# Altium PCB SW 12.PcbDoc
Units mil, origin at the board's own origin, x right, y up, seen from the top; angles counter-clockwise.
Board outline 1623 x 1170 mil, 2 copper layers (Top Layer, Bottom Layer); 16 components, 9 nets, 43 pads, 14 vias.
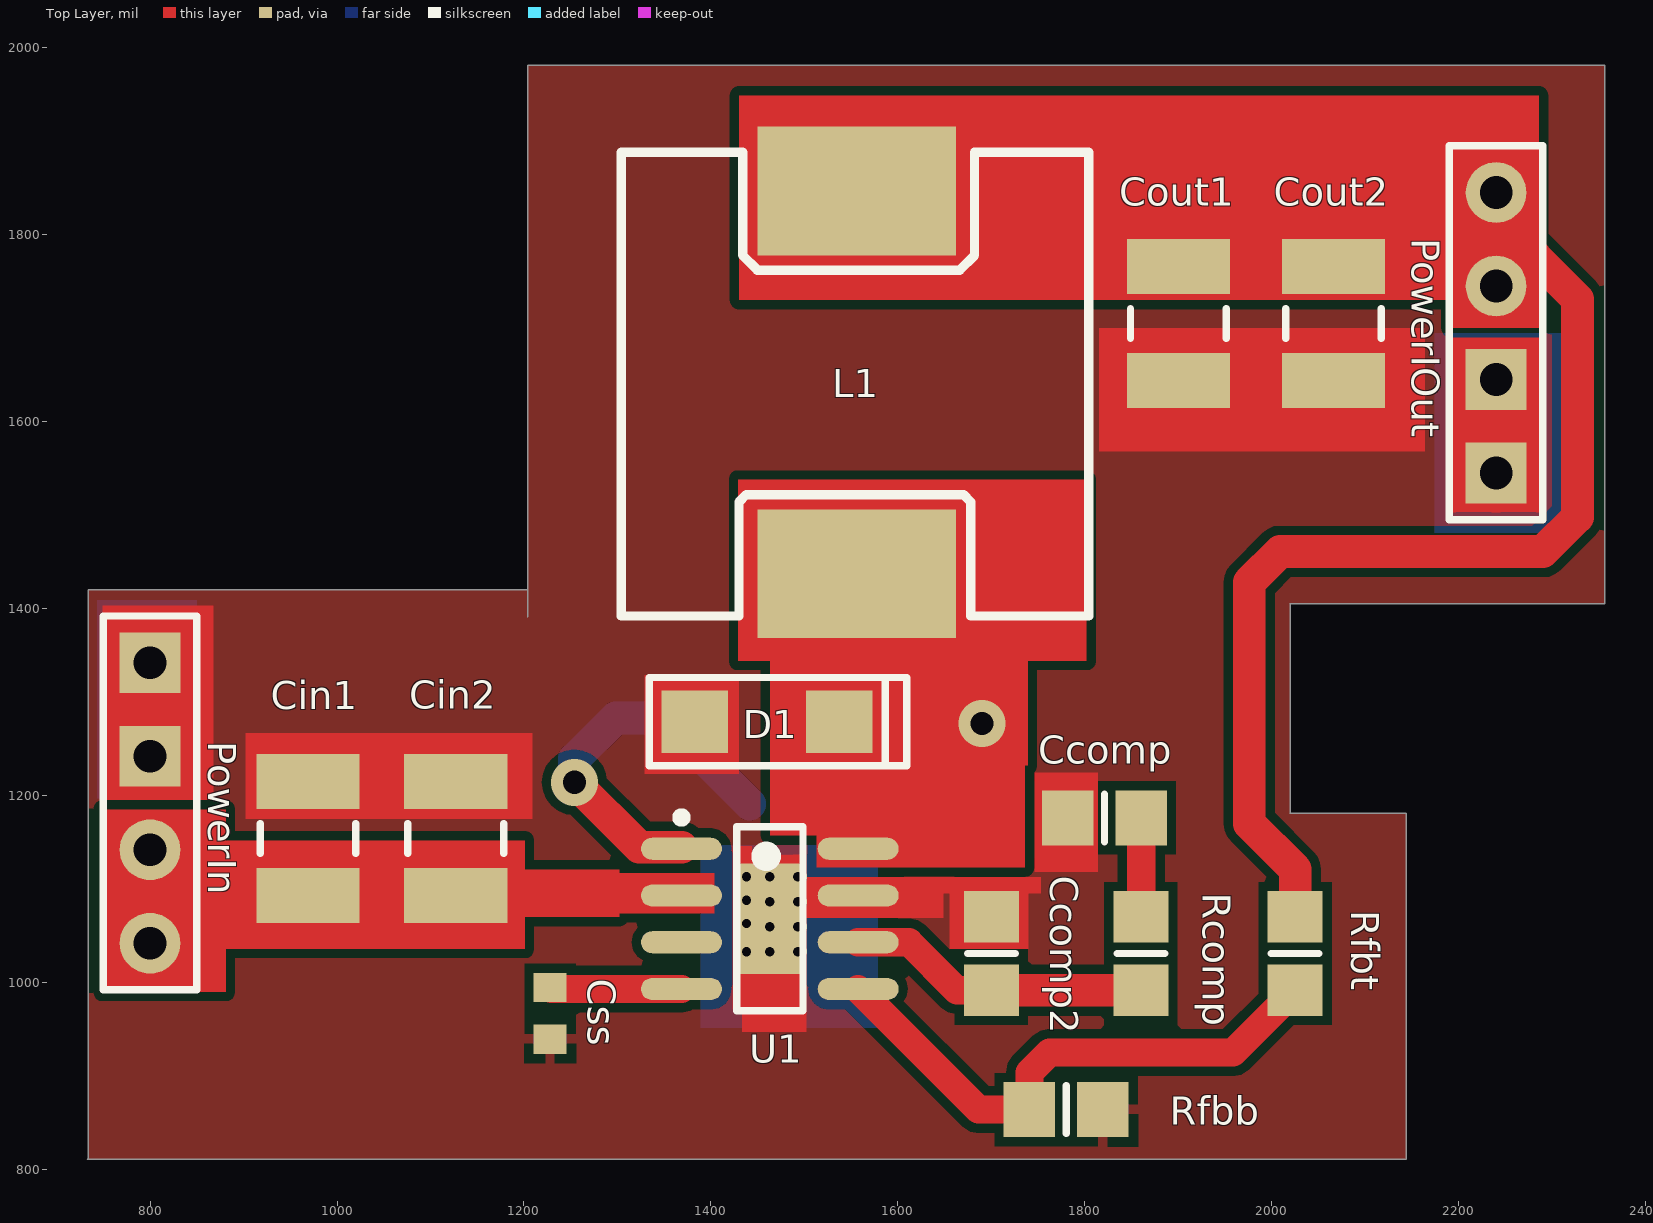
[diagram p0: Top Layer view]
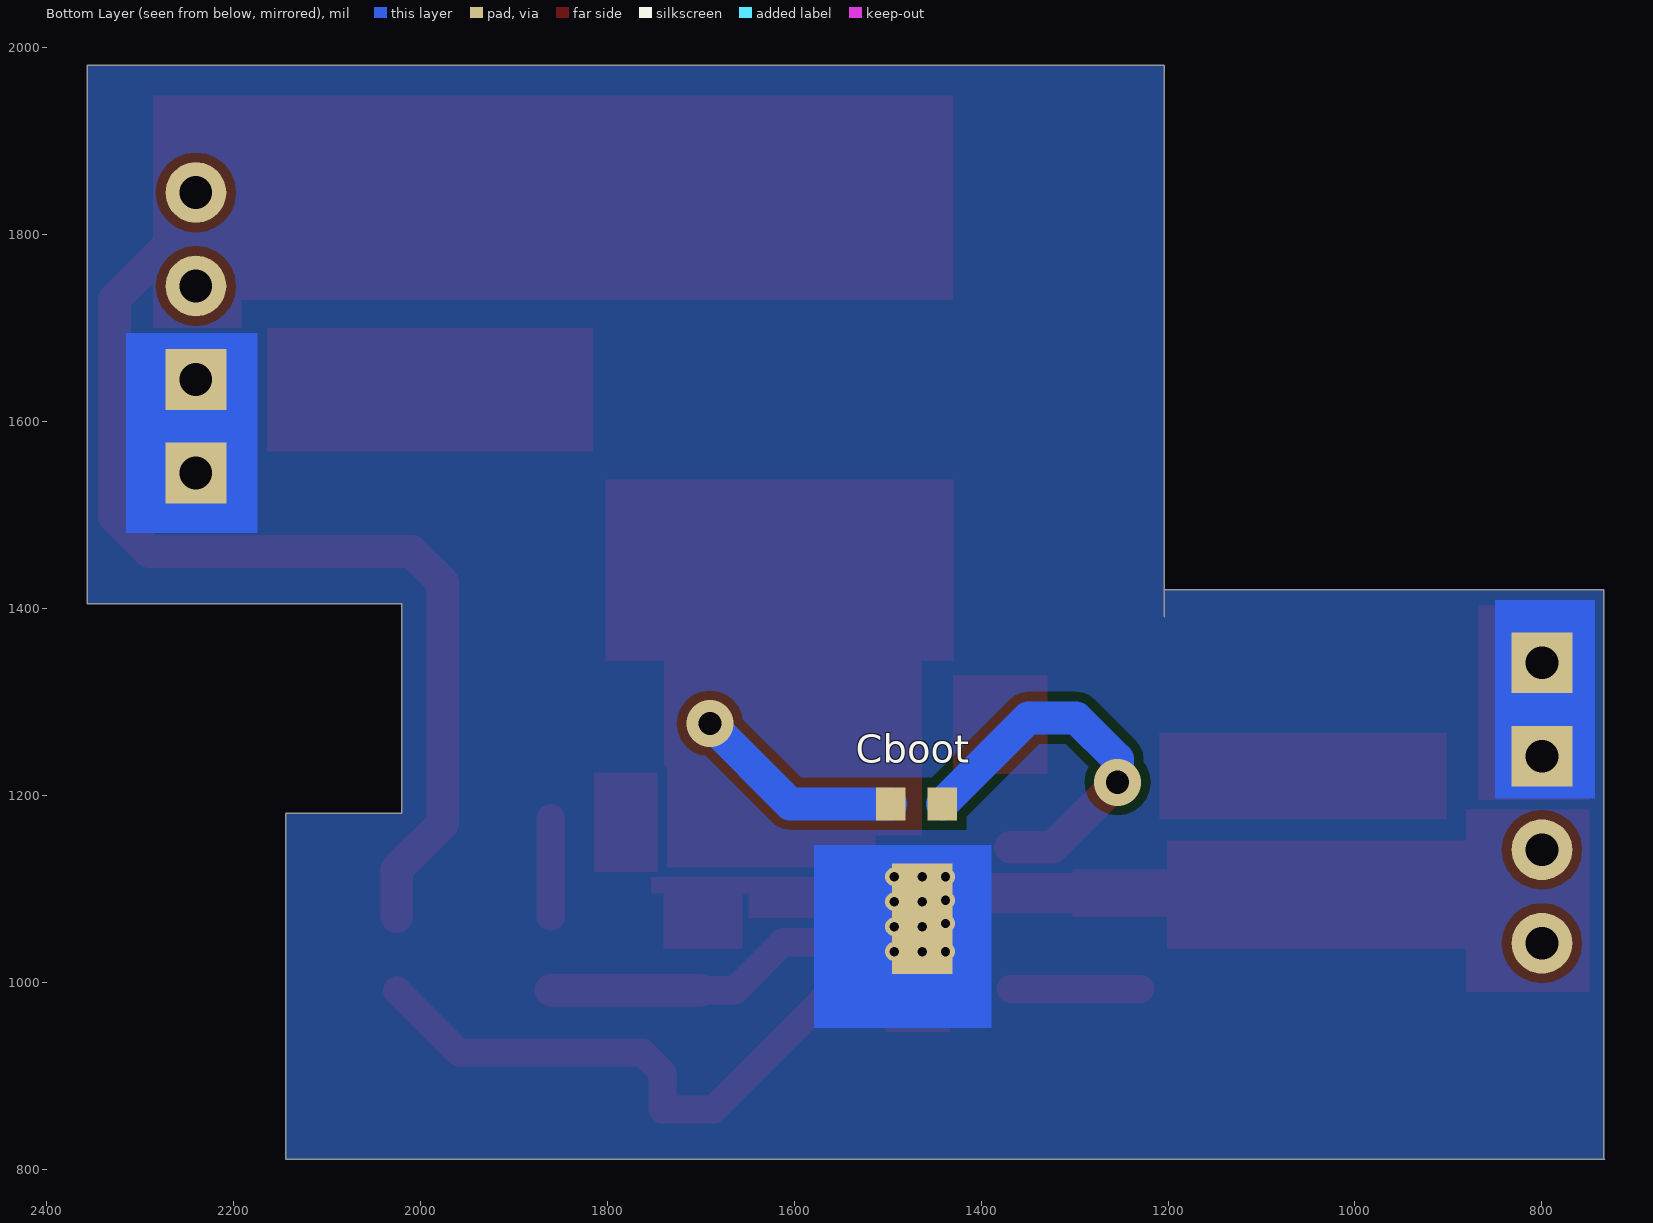
[diagram p1: Bottom Layer view, seen from below]

## Layer stack, top to bottom
Top Solder: solder mask 0.4, Solder Resist, Dk 3.5
Top Layer: signal copper 1.4
Dielectric 1: dielectric 12.6, FR-4, Dk 4.8
Bottom Layer: signal copper 1.4
Bottom Solder: solder mask 0.4, Solder Resist, Dk 3.5

## Board outline
734,1391 734,1420 967,1420 1204,1420 1204,1391 1204,1981 2356,1981 2356,1405 2020,1405 2020,1181 2144,1181 2144,811 733,811 734,812

## Design rules (kind name [scope] priority, off if disabled: settings)
Clearance [All] p1: gap=10
ComponentClearance [All] p1: gap=5 collisioncheckmode=3 verticalgap=5 showdistances=FALSE
PolygonConnect [All] p1: connectstyle=Relief reliefconductorwidth=10 reliefentries=4 polygonreliefangle="90 Angle" airgapwidth=10
RoutingVias [All] p1: holewidth=25 width=50 viastyle="Through Hole" minholewidth=10 minwidth=10 maxholewidth=28 maxwidth=50
SolderMaskExpansion [All] p1: expansion=4
Width [All] p1: maxlimit=50 minlimit=10 preferedwidth=20
29 further rules are at their usual default settings.

## Components (designator, comment, footprint, x,y, rotation, side; value= is the part's Value field where it differs from the comment)
Cboot "C1608X7R1E104K" 1608[0603] 1469,1191 r0 bottom
Ccomp "CC0805KRX7R9BB152" 6-0805_M 1821,1176 r180 top
Ccomp2 "CL21C300JBANNNC" 6-0805_M 1700,1031 r90 top
Cin1 "GRM32ER71H475KA88L" C1210_M 969,1154 r90 top
Cin2 "GRM32ER71H475KA88L" C1210_M 1127,1154 r90 top
Cout1 "GRM32ER61E226KE15L" C1210_M 1900,1705 r270 top
Cout2 "GRM32ER61E226KE15L" C1210_M 2066,1705 r270 top
Css "GRM188R71E822KA01D" 1608[0603] 1228,967 r270 top
D1 "B340A-13-F" "SMA Diode Package" 1460,1279 r180 top
L1 "SRR1260-150M" SRR1260 1556,1640 r90 top
PowerIn "Header 4" HDR1X4 800,1042 r90 top
PowerIOut "Header 4" HDR1X4 2240,1845 r270 top
Rcomp "CRCW080538K3FKEA" 6-0805_M 1860,1031 r90 top
Rfbb "CRCW0805732RFKEA" 6-0805_M 1780,864 r0 top
Rfbt "CRCW080510K2FKEA" 6-0805_M 2025,1031 r270 top
U1 "TPS54331DDAR" TI-D8_N 1463,1068 r0 top

## Footprints (in the part's own frame and the unit in brackets; to place one, negate y for a bottom-side part, rotate by r counter-clockwise, add the part's x,y. Pads: shape width x height; smd on the part's side, far side on the other; paste and mask are expansions set on the pad)
6-0805_M [mm] "Chip Resistor, Body 2.0x1.2mm, IPC Low Density"
  rect 1.4x1.5 smd: 1(-1,0) 2(1,0)
  silkscreen extent 0,-0.65 0,0.65, body extent -1.07,-0.7 1.07,0.7, height 0.7
1608[0603] [mm] "Chip Capacitor, Body 1.6x0.8mm, IPC High Density"
  rect 0.8x0.9 smd: 1(-0.7,0) 2(0.7,0)
  body extent -0.87,-0.48 0.87,0.48, height 1.3
C1210_M [mm] "Chip Capacitor, Body 3.2x2.5mm, IPC Low Density"
  rect 1.5x2.8 smd: 1(-1.55,0) 2(1.55,0)
  silkscreen extent -0.4,-1.3 0.4,1.3, body extent -1.7,-1.35 1.7,1.35, height 1.5
HDR1X4 [mil] "Connector; Header; 4 Position"
  round 65 hole 35: 1(0,0) 2(100,0)
  rect 65x65 hole 35: 3(200,0) 4(300,0)
  silkscreen extent -50,-50 350,50
"SMA Diode Package" [mm]
  rect 1.8x1.7 smd: 1(-1.965,0) 2(1.965,0)
  silkscreen extent -3.8,-1.2 3.2,1.2, body extent -2.6,-1.2 2.6,1.2, height 2.44
SRR1260 [mm]
  rect 3.5x5.4 smd paste+0: 1(-5.15,0)
  rect 3.5x5.4 smd: 2(5.25,0)
  silkscreen extent -6.3,-6.3 6.3,6.4, body extent -6.3,-6.3 6.3,6.4, height 6.15
TI-D8_N [mm] "SOIC, 8-Leads, Body 4.9x3.9mm, Pitch 1.27mm, IPC Medium Density"
  oval 2.2x0.6 smd: 1(-2.4,1.905) 2(-2.4,0.635) 3(-2.4,-0.635) 4(-2.4,-1.905) 5(2.4,-1.905) 6(2.4,-0.635) 7(2.4,0.635) 8(2.4,1.905)
  silkscreen extent -2.52,-2.5 0.9,2.88, body extent -2,-2.5 2,2.5, height 1.75

## Part data
Ccomp: "CC0805KRX7R9BB15"
Cin1 Cin2: "GRM32ER71H475KA8"
Cout1 Cout2: "GRM32ER61E226KE1"
Css: "GRM188R71E822KA0"
PowerIn PowerIOut: "Header, 4-Pin"

## Free pads (board coordinates)
  rect 65x118.11 all layers, no hole: ""(1463,1068)

## Via types
v1: diameter 20, hole 10, Top Layer to Bottom Layer, 12 vias
v2: diameter 50, hole 25, Top Layer to Bottom Layer, 2 vias

## Nets (pads, with @x,y where several pads share a name; then routed paths per layer and width w, separated by ;. In a path a pad name is that pad's centre, name@x,y a point inside that pad or via, vN(x,y) a via of type N, cw(c..) or ccw(c..) an arc to the next point about the centre after c; other vN are vias at no path point)
GND: Ccomp2.2 Ccomp.2 Cin1.2 Cin2.2 Cout1.2 Cout2.2 Css.2 D1.2 pad. PowerIn.3 PowerIn.4 PowerIOut.3 PowerIOut.4 Rfbb.2 U1.7
  other v1: 1438,1033 1463,1033 1493,1033 1463,1059.67 1493,1059.67 1438,1063 1463,1086.33 1493,1086.33 1438,1088 1438,1113 1463,1113 1493,1113
NetCboot_1: Cboot.1 U1.1 | length 412.1
  Top Layer w35: v2(1254,1214) 1323.5,1144.5 U1.1@1368.51,1144.5
  Bottom Layer w35: v2(1254,1214) 1254,1238.96 1298.04,1283 1349.44,1283 Cboot.1
NetCcomp2_1: Ccomp2.1 Rcomp.1 U1.6 | length 323.8
  Top Layer w30: U1.6 1612,1043 1663.37,991.63 Ccomp2.1
  Top Layer w35: Ccomp2.1 Rcomp.1
NetCcomp_1: Ccomp.1 Rcomp.2 | length 105.3
  Top Layer w30: Rcomp.2@1860.37,1070.74 Ccomp.1
NetCss_1: Css.1 U1.4 | length 139
  Top Layer w30: Css.1@1229.56,993 U1.4
NetRfbb_1: Rfbb.1 Rfbt.2 U1.5 | length 597
  Top Layer w30: U1.5 1686.49,864 Rfbb.1 1740.63,903.63 1762,925 1958.37,925 Rfbt.2
PH: Cboot.2 D1.1 L1.1 U1.8 | length 416.5
  Top Layer w40: U1.8 v2@1690,1275.51
  Bottom Layer w35: Cboot.2 1604,1191 v2(1690,1277)
VIN: Cin1.1 Cin2.1 PowerIn.1 PowerIn.2 U1.2 | length 241.5
  Top Layer w35: Cin2.1 U1.2
VOUT: Cout1.1 Cout2.1 L1.2 PowerIOut.1 PowerIOut.2 Rfbt.1 | length 1141
  Top Layer w35: Rfbt.1 2025,1121 1976,1170 1976,1428 2009,1461 2290,1461 2327,1498 2327,1731 2240,1818 PowerIOut.1
pads on no net: U1.3

## Polygon pours and split planes (outlines as drawn)
GND on Top Layer "gnd mask" (solid, pour order 8): 734,1420 734,812 735,811 2144,811 2144,1181 2020,1181 2020,1405 2356,1405 2356,1981 1204,1981 1204,1420
GND on Bottom Layer "gnd mask" (solid, pour order 11): 734,1420 733.5,1419.5 733.5,811.5 2143.5,811.5 2144,811 2144,1181 2020,1181 2020,1405 2356,1405 2356,1981 1204,1981 1204,1420 734,1420

## Other copper
Top Layer:
  rectangle net GND: 2193.45,1502.5 2292.27,1689.8
  rectangle net GND: 1815,1568 2164,1700
  rectangle net GND: 1649,1095 1753,1113
  rectangle net GND: 1655.47,1035.58 1739.53,1107.93
  rectangle net GND: 1488,1069 1649,1113
  rectangle net GND: 1423,971 1444,1146
  rectangle net GND: 1433,947 1502,1137.06
  rectangle net GND: 1746.21,1118 1814,1224.79
  rectangle net GND: 1329,1223 1430,1329
  rectangle net GND: 749,1195.2 868,1403
  rectangle net GND: 902,1175 1209,1267
  rectangle net PH: 1463,1157 1611,1348
  rectangle net PH: 1513,1123 1572,1165
  rectangle net PH: 1537.36,1123 1736,1279
  rectangle net VIN: 1252,1074 1404,1117
  rectangle net VIN: 1194,1070 1302,1121
  rectangle net VIN: 749,990 881,1185
  rectangle net VIN: 750,992 851,1178
  rectangle net VIN: 769,1036 1201,1152
  rectangle net VOUT: 2191,1700 2286,1730
  rectangle net VOUT: 1430,1730 2286,1949
  rectangle net PH: 1492,1232 1739,1363
  rectangle net PH: 1618,1242 1733,1366
  rectangle net PH: 1429,1344 1802,1538
Bottom Layer:
  rectangle net GND: 2174,1481 2315,1695
  rectangle net GND: 743,1197 850,1409
  rectangle net GND: 1389,951 1579,1147